# Altium PCB PCB1.PcbDoc (part 3 of 3)
Units mil, origin at the board's own origin, x right, y up, seen from the top; angles counter-clockwise.
Board outline 2406.58 x 2514.76 mil, 4 copper layers (Top Layer, GND1, GND2, Bottom Layer), stack 22.334 mil thick; 96 components, 76 nets, 372 pads, 263 vias.
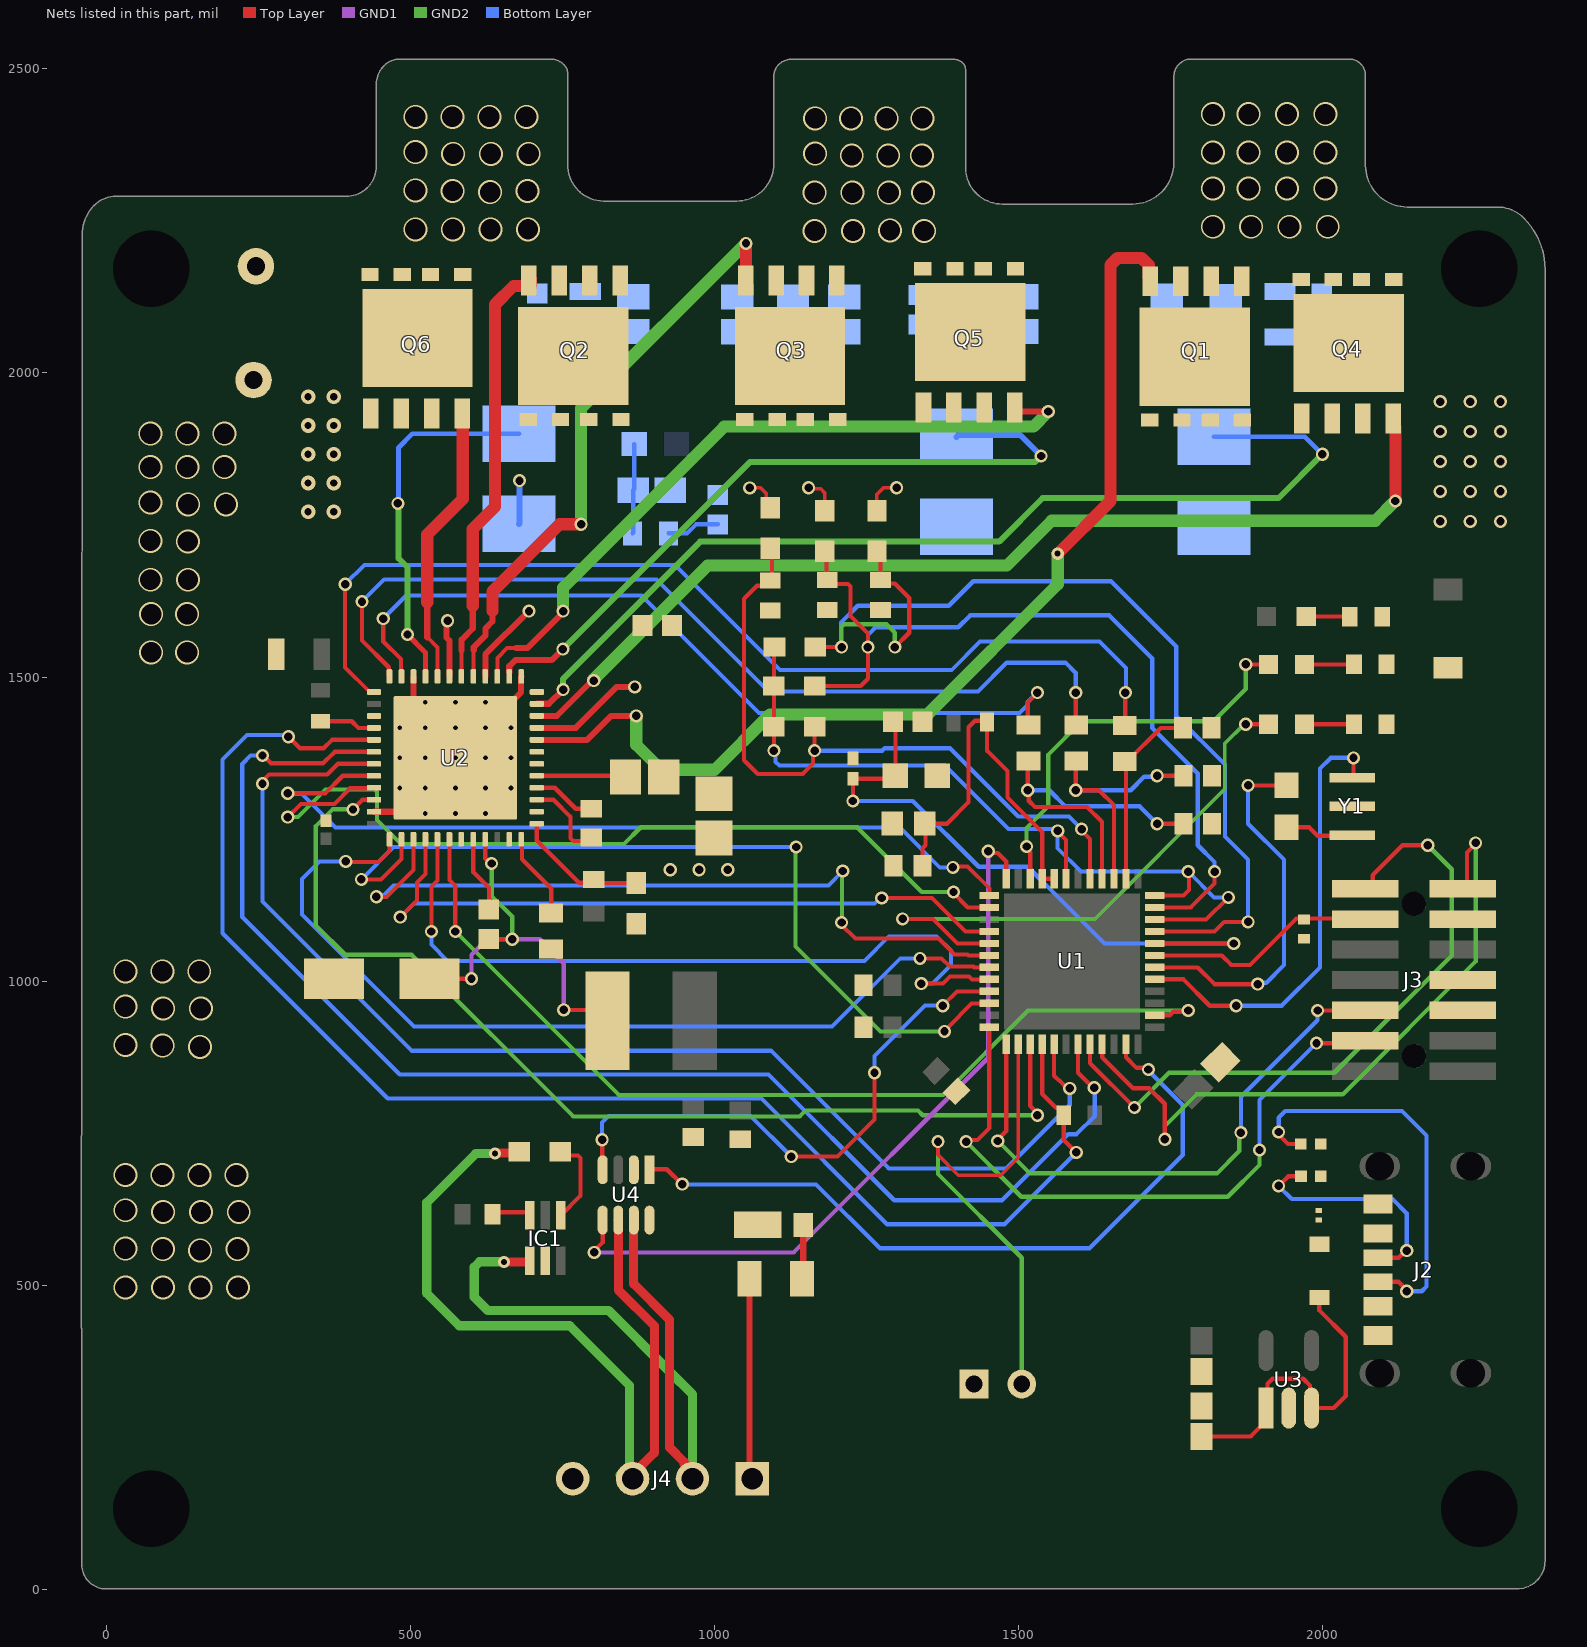
[diagram p4: the nets of this part, all layers, seen from the top]

## Via types
v1: diameter 21.65, hole 13.78, Top Layer to Bottom Layer, 139 vias
v2: diameter 39.37, hole 33.46, Top Layer to Bottom Layer, 90 vias
v3: diameter 19.68, hole 7.87, Top Layer to Bottom Layer, 21 vias
v4: diameter 24, hole 12, Top Layer to Bottom Layer, 10 vias
v5: diameter 20, hole 10, Top Layer to Bottom Layer, 3 vias

## Nets (pads, with @x,y where several pads share a name; then routed paths per layer and width w, separated by ;. In a path a pad name is that pad's centre, name@x,y a point inside that pad or via, vN(x,y) a via of type N, cw(c..) or ccw(c..) an arc to the next point about the centre after c; other vN are vias at no path point) (continued)
+VBATT: C12.2 C13.1 C15.1 C19.1 C20.1 C23.1 C24.1 C29.1 C32.1 C33.1 C34.1 C35.1 C36.1 C37.1 C38.1 C39.1 pad.8 Q1.5 Q1.6 Q1.7 Q1.8 Q1.9 Q2.5 Q2.6 Q2.7 Q2.8 Q2.9 Q3.5 Q3.6 Q3.7 Q3.8 Q3.9 R10.2 R17.2 U2.6 U2.7 U2.47
  other v2: 154.12,892.09 92.67,894.06 31.23,895.04 93.33,955.08 155.43,955.08 31.23,958.03 31.23,1016.11 92.02,1016.11 152.81,1016.11 73.74,1540.43 132.8,1540.43 73.74,1603.43 132.8,1603.43 72.49,1659.89 134.21,1659.89 133.93,1722.88 72.49,1723.86 134.59,1783.9 196.69,1783.9 72.49,1786.85 72.49,1844.92 133.28,1844.92 194.07,1844.92 72.49,1900.04 133.28,1900.04 194.07,1900.04
"ADC1 IN2 / COMP1 INP": R22.1 R25.2 R30.2 U1.9 | length 1716.6
  Top Layer w7: R30.2@1165.35,1549.21 v1(1208.66,1549.21) ; R22.1@1269.68,1693.9 1272.64,1690.94 R25.2@1272.64,1659.62 ; R25.2@1272.64,1649.78 R25.2@1272.64,1659.62 ; v1(1296.26,1549.21) 1319.88,1572.83 1319.88,1629.87 1296.01,1653.74 1278.52,1653.74 R25.2@1272.64,1659.62 ; U1.9@1723.6,1081.69 1821.85,1081.69 1837.6,1097.44 v1(1876.97,1097.44)
  GND2 w7: v1(1208.66,1549.21) 1208.66,1582.51 1212.76,1586.61 1282.48,1586.61 1296.26,1572.83 v1(1296.26,1549.21)
  Bottom Layer w7: v1(1208.66,1549.21) 1207.68,1550.2 1207.68,1589.57 1235.24,1617.13 1384.84,1617.13 1425.07,1657.36 1651.7,1657.36 1758.86,1550.2 1758.86,1436.02 1838.85,1356.03 1838.85,1237.92 1876.97,1199.8 v1(1876.97,1097.44)
"ADC1 IN3/COMP2 INM": R28.1 R29.1 R30.1 U1.10 U1.12 U1.19 | length 1336.2
  Top Layer w6.5: v1(1097.44,1378.94) R28.1@1097.44,1418.31 ; 1097.44,1436.02 R29.1@1097.44,1485.24 R30.1@1097.44,1549.21 ; v1(1563.98,1247.05) 1563.98,1245.51 1577.76,1231.73 U1.19@1577.76,1168.48 ; U1.10@1723.6,1101.38 1808.07,1101.38 v1(1844.49,1137.8) ; U1.12@1723.6,1140.75 1770.67,1140.75 1779.58,1149.66 1779.58,1179.08 v1(1778.54,1180.12)
  Bottom Layer w6.5: v1(1097.44,1378.94) 1100.34,1376.04 1100.34,1360.29 1106.3,1354.33 1378.94,1354.33 1483.27,1250 1552.59,1250 1552.65,1249.95 1561.08,1249.95 v1(1563.98,1247.05) 1563.98,1218.5 1602.36,1180.12 v1(1778.54,1180.12) 1820.87,1137.8 v1(1844.49,1137.8)
"ADC1 IN4 / COMP2 INP": R23.1 R26.2 R29.2 U1.11 | length 1415.5
  Top Layer w7: R29.2@1164.37,1485.24 1164.37,1497.48 1167.76,1494.09 1175.2,1494.09 1175.2,1488.57 1178.59,1485.18 1240.1,1485.18 1251.97,1497.05 v1(1251.97,1549.21) 1251.97,1571.76 1223.43,1600.31 1223.43,1648.63 1219.32,1652.73 R26.2@1187.99,1652.73 ; R23.1@1184.06,1693.9 1184.06,1650.76 R26.2@1185.04,1649.78 ; U1.11@1723.6,1121.06 1782.48,1121.06 1821.85,1160.43 v1(1821.85,1180.12)
  Bottom Layer w7: v1(1251.97,1549.21) 1251.97,1569.03 1260.2,1577.26 1260.2,1577.59 1264.3,1581.69 1400.59,1581.69 1420.28,1601.38 1648.62,1601.38 1719.49,1530.51 1719.49,1416.34 1794.29,1341.54 1794.29,1223.43 1821.64,1196.07 1821.64,1180.32 v1(1821.85,1180.12)
"ADC1 IN15 / COMP4 INP": R24.1 R27.2 R28.2 U1.17 | length 1146.9
  Top Layer w7: R27.2@1091.54,1648.97 1094.49,1651.92 1094.49,1658.81 R24.1@1094.49,1698.82 ; R27.2@1091.54,1658.81 1082.66,1649.94 1069.52,1649.94 1048.23,1628.64 1048.23,1363.19 1070.87,1340.55 1144.68,1340.55 1161.74,1357.61 1161.74,1376.31 v1(1164.37,1378.94) R28.2@1164.37,1418.31 ; v1(1603.35,1250) 1603.35,1247.03 1616.94,1233.43 1616.94,1168.67 U1.17@1617.13,1168.48
  Bottom Layer w7: v1(1164.37,1378.94) 1275.6,1378.94 1279.54,1382.87 1386.81,1382.87 1499.02,1270.67 1582.68,1270.67 v1(1603.35,1250)
ADC2_IN3: C8.1 R6.1 U1.14 | length 312.1
  Top Layer w7: R6.1@1674.21,1361.22 1676.18,1359.25 U1.14@1676.18,1168.48 ; R6.1@1678.15,1361.22 1733.27,1416.34 C8.1@1769.68,1416.34 C8.1@1766.73,1419.29
ADC2_IN4: C9.1 R7.1 U1.15 | length 429.7
  Top Layer w7: R7.1@1594.49,1362.2 1593.5,1361.22 v1(1593.5,1313.98) 1631.89,1313.98 1656.5,1289.37 U1.15@1656.5,1168.48 ; v1(1727.36,1337.6) C9.1@1770.67,1337.6
  Bottom Layer w7: v1(1593.5,1313.98) 1684.06,1313.98 1706.04,1335.96 1725.72,1335.96 v1(1727.36,1337.6)
ADC2_IN5: C10.2 R8.1 U1.16 | length 573.6
  Top Layer w7: R8.1@1515.75,1362.2 1514.76,1361.22 v1(1514.76,1313.98) 1516.41,1312.33 1516.41,1296.59 1526.57,1286.42 1612.2,1286.42 1636.63,1262 1636.63,1168.67 U1.16@1636.81,1168.48 ; v1(1727.36,1258.86) C10.2@1770.67,1258.86
  Bottom Layer w7: v1(1514.76,1313.98) 1550.2,1313.98 1576.77,1287.4 1698.82,1287.4 v1(1727.36,1258.86)
"CAN Mode": IC1.6 R4.2 | length 55.2
  Top Layer w7: R4.2@631.2,620.08 686.35,620.08
"CAN Term.": IC1.4 R31.2 | length 145.5
  Top Layer w7: R31.2@746.06,719.49 751.97,713.58 775.43,713.58 779.53,709.48 779.53,647.4 IC1.4@747.13,615
CAN_N: J4.3 R31.1 U4.6 | length 1354.1
  Top Layer w15: v5(638.78,716.54) 639.74,717.49 677.14,717.49 R31.1@679.13,719.49 ; U4.6@841.54,607.26 841.79,607.01 841.79,590.51 841.83,590.47 841.83,492.29 900.89,433.24 900.89,224.7 J4.3@864.31,188.12
  GND2 w15: v5(638.78,716.54) 607.28,716.54 526.71,635.96 526.71,487.07 580.17,433.61 761.73,433.61 860.21,335.14 860.21,187.99 J4.3@844.46,187.99
CAN_P: IC1.1 J4.2 U4.7 | length 1172.3
  Top Layer w15: v5(653.54,538.39) 695.57,538.39 695.94,538.76 IC1.1@695.94,540.2 ; U4.7@867.13,607.26 866.87,607.01 866.87,590.51 866.83,590.47 866.83,502.65 925.89,443.59 925.89,233.56 950.08,209.37 950.08,206.45 967.58,188.94 J4.2@970.51,188.94
  GND2 w15: v5@653.46,538.47 653.16,538.77 613.63,538.77 604.84,529.98 604.84,480.79 627.02,458.61 825.69,458.61 925.89,358.41 963.58,320.72 J4.2@963.58,182.09
CAN_RX: U1.33 U4.4 | length 920.6
  Top Layer w6.5: v1(1125.98,711.61) 1201.77,711.61 1262.8,772.64 v1(1262.8,849.41) ; v1(1375,959.65) 1398.19,982.83 1451.16,982.83 U1.33@1451.6,983.27
  Top Layer w7: v1(814.96,739.17) 815.45,738.68 815.45,690.47 U4.4@815.94,689.98
  Bottom Layer w6.5: v1(1262.8,849.41) 1262.8,876.97 1345.47,959.65 v1(1375,959.65)
  Bottom Layer w7: v1(814.96,739.17) 814.96,767.72 825.79,778.54 1059.06,778.54 v1(1125.98,711.61)
CAN_TX: U1.47 U4.1 | length 1224.8
  Top Layer w7: U4.1@892.72,689.98 893.68,690.94 921.26,690.94 945.87,666.34 v1(946.85,666.34) ; U1.47@1676.18,896.48 1676.37,896.3 1676.37,874.89 1693.74,857.52 1710.18,857.52 v1(1712.98,854.71)
  Bottom Layer w7: v1(946.85,666.34) 947.26,665.93 1166.75,665.93 1271.65,561.02 1616.14,561.02 1769.41,714.29 1769.41,796.4 1712.98,852.83 v1(1712.98,854.71)
"ESC PWM/TIM2_CH1": P1.2 U1.38 | length 831.6
  Top Layer w6: v1(1367.13,736.22) 1367.13,714.57 1400.59,681.1 1470.47,681.1 1499.02,709.65 U1.38@1499.02,896.48
  GND2 w7: v1(1367.13,736.22) 1367.13,683.07 1504.92,545.28 P1.2@1504.92,327.75
ESC_NRST: C1.1 J3.12 U1.7 | length 390.9
  Top Layer w7: U1.7@1723.6,1042.32 1833.66,1042.32 1849.41,1026.57 1879.92,1026.57 1956.3,1102.95 J3.12@2076.38,1102.95
FB: R12.1 R13.2 U2.1 | length 224.4
  Top Layer w7: U2.1@707.68,1258.86 707.68,1231.3 777.07,1161.91 795.77,1161.91 R12.1@801.18,1167.32 807.09,1161.42 R13.2@871.06,1161.42
GHA: Q1.4 U2.8 | length 1726
  Top Layer w10: U2.8@707.68,1396.65 790.35,1396.65 829.72,1436.02 v1(871.08,1436.02)
  Top Layer w20: v5(1563.98,1702.76) 1650.59,1789.37 1650.59,2177.26 1662.31,2188.98 1701.83,2188.98 1713.54,2177.26 1713.54,2155.74 Q1.4@1719.13,2150.15
  GND2 w20: v1(871.08,1436.02) 871.08,1388.76 912.4,1347.44 1000,1347.44 1091.04,1438.48 1349.9,1438.48 1563.98,1652.56 v5(1563.98,1702.76)
GHB: Q3.4 U2.17 | length 981.1
  Top Layer w6.5: U2.17@603.35,1500.98 603.35,1543.58 604.06,1544.29
  Top Layer w10: 604.06,1544.29 604.06,1548.99 623.05,1567.99 623.05,1579.65 634.84,1591.44 634.84,1608.27
  Top Layer w20: 634.84,1608.27 634.84,1640.75 745.08,1750.98 v1(780.51,1750.98) ; Q3.4@1051.57,2150.15 v1(1051.57,2212.76)
  GND2 w20: v1(780.51,1750.98) 780.51,1942.15 1051.13,2212.76 v1(1051.57,2212.76)
GHC: Q2.4 U2.18 | length 717.7
  Top Layer w6.5: 583.35,1543.31 583.66,1542.99 U2.18@583.66,1500.98
  Top Layer w10: 584.06,1544.02 584.06,1561.42 602.36,1579.72 602.36,1617.13
  Top Layer w20: 602.36,1617.13 602.36,1743.11 639.01,1779.76 639.01,2112.43 669.59,2143.01 697.87,2143.01 Q2.4@697.87,2155.59
GLA: Q4.4 U2.10 | length 1705.9
  Top Layer w10: U2.10@707.68,1436.02 740.9,1436.02 799.96,1495.08 v1@800.2,1495.08
  Top Layer w20: Q4.4@2115.2,1935.88 2115.2,1914.65 2119.09,1910.75 v1(2119.09,1789.37)
  GND2 w20: v1@800.2,1495.08 988.19,1683.07 1480.31,1683.07 1554.13,1756.89 2086.17,1756.89 2118.65,1789.37 v1(2119.09,1789.37)
  other v1: 801.18,1494.09
GLB: Q5.4 U2.15 | length 1181.2
  Top Layer w6.5: U2.15@642.72,1500.98 642.72,1531.5 659.02,1547.8 673.55,1547.8
  Top Layer w10: 673.55,1547.8 692.48,1547.8 750.98,1606.3 v1(750.98,1608.27) ; Q5.4@1496.52,1933.59 1499.44,1936.51 v1(1548.51,1936.51)
  GND2 w20: v1(750.98,1608.27) 750.98,1646.65 1015.87,1911.54 1523.98,1911.54 1548.51,1936.06 v1(1548.51,1936.51)
GLC: Q6.4 U2.20 | length 467.2
  Top Layer w6.5: 527.61,1565.43 544.29,1548.75 U2.20@544.29,1500.98
  Top Layer w10: 527.61,1565.43 527.61,1622.98
  Top Layer w20: 527.56,1623.03 527.56,1734.25 586.05,1792.74 Q6.4@586.05,1937.07
GND: C1.2 C2.2 C3.2 C4.2 C5.2 C6.1 C7.2 C8.2 C9.2 C10.1 C11.1 C12.1 C15.2 C18.2 C19.2 C20.2 C23.2 C24.2 C25.1 C26.1 C27.2 C28.2 C29.2 C30.1 C31.1 C32.2 C33.2 C34.2 C35.2 C36.2 C37.2 C38.2 C39.2 D1.2 D4.1 D5.2 IC1.2 J2.A12 J2.B12 J3.5 J3.7 J3.11 J4.4 P1.1 pad.9 R1.1 R2.1 R3.1 R13.1 R15.1 R18.1 R19.1 R20.1 R21.1 R25.1 R26.1 R27.1 R32.2 R33.2 U2.2 U2.12 U2.13 U2.22 U2.27 U2.35 U2.43 U2.49 U3.2 U4.2 U4.8 Y1.2 | length 302.7
  Top Layer w10: U2.35@439.96,1278.54 U2.49@521.26,1278.54 ; U2.22@504.92,1500.98 504.92,1463.5 509.76,1458.66 v3(524.21,1458.66) ; v3(623.43,1458.66) 665.35,1458.66 681.81,1475.12 681.81,1500.71 U2.13@682.09,1500.98
  Bottom Layer w10: R21.1@678.15,1751.77 679.13,1752.76 v1(679.13,1822.83)
  other v1: 927.17,1183.07 974.41,1183.07 1021.65,1183.07 2192.91,1755.91 2242.13,1755.91 2291.9,1755.9 2192.91,1805.12 2242.13,1805.12 2291.9,1805.11 2192.91,1854.33 2242.13,1854.33 2291.9,1854.32 2192.91,1903.54 2242.13,1903.54 2291.9,1903.54 2192.91,1952.76 2242.13,1952.76 2291.9,1952.75
  other v2: 31.38,496.42 93.11,496.42 154.84,496.42 216.56,496.42 154.28,557.44 92.83,559.41 215.72,559.41 31.38,560.4 93.49,620.44 155.59,620.44 217.69,620.44 31.38,623.39 31.38,681.46 92.17,681.46 152.96,681.46 213.75,681.46
  other v3: 524.21,1275.59 573.82,1275.59 623.43,1275.59 482.28,1317.52 524.21,1317.52 573.82,1317.52 623.43,1317.52 665.35,1317.52 482.28,1367.13 524.21,1367.13 573.82,1367.13 623.43,1367.13 665.35,1367.13 482.28,1416.73 524.21,1416.73 573.82,1416.73 623.43,1416.73 665.35,1416.73 573.82,1458.66
  other v4: 331.69,1771.65 374.02,1771.65 331.69,1818.9 374.02,1818.9 331.69,1866.14 374.02,1866.14 331.69,1913.39 374.02,1913.39 331.69,1960.63 374.02,1960.63
"GPIO PA6": R11.1 U2.28 | length 92.1
  Top Layer w7: R11.1@352.36,1427.17 403.54,1427.17 414.37,1416.34 U2.28@439.96,1416.34
"GPIO PB11": U1.24 U4.5 | length 1243.4
  Top Layer w7: v1(802.17,554.13) 802.17,556.74 815.94,570.51 U4.5@815.94,607.26 ; v1(1449.8,1213.58) 1452.61,1210.78 1465.4,1210.78 1479.33,1196.85 U1.24@1479.33,1168.48
  GND1 w7: v1(802.17,554.13) 1129.92,554.13 1449.8,874.02 v1(1449.8,1213.58)
"GPIO PB12": U1.25 U2.32 | length 1385.1
  Top Layer w6.5: v1(1391.73,1187.01) 1393.5,1188.77 1415.56,1188.77 1451.6,1152.73 U1.25@1451.6,1140.75
  Top Layer w7: v1(298.23,1309.06) 360.24,1309.06 388.78,1337.6 U2.32@439.96,1337.6
  Bottom Layer w6.5: v1(298.23,1309.06) 299.88,1307.4 321.53,1307.4 376.44,1252.5 1304.59,1252.5 1370.08,1187.01 v1(1391.73,1187.01)
"GPIO PB13": U1.26 U2.33 | length 1465.1
  Top Layer w7: v1(298.23,1269.68) 319.88,1291.34 375,1291.34 400.78,1317.12 439.17,1317.12 U2.33@439.96,1317.91 ; v1(1392.72,1146.65) 1392.72,1144.68 1416.15,1121.25 1451.41,1121.25 U1.26@1451.6,1121.06
  GND2 w7: v1(298.23,1269.68) 314.96,1269.68 360.24,1314.96 440.78,1314.96 444.88,1310.86 444.88,1264.76 484.25,1225.39 850.89,1225.39 878.44,1252.95 1234.25,1252.95 1340.55,1146.65 v1(1392.72,1146.65)
"GPIO PC10": U1.39 U2.34 | length 1722.5
  Top Layer w7: v1(405.52,1282.17) 405.52,1282.49 421.26,1298.23 U2.34@439.96,1298.23 ; U1.39@1518.7,896.48 1518.7,795.3 1530.51,783.49 v1(1530.51,779.53)
  GND2 w7: v1(405.52,1282.17) 405.21,1282.48 372.05,1282.48 344.49,1254.92 344.49,1091.54 392.72,1043.31 501.97,1043.31 767.72,777.56 1139.75,777.56 1149.59,787.4 1334.13,787.4 1342.01,779.53 v1(1530.51,779.53)
NetC6_2: C6.2 C7.1 FB1.1 U1.20 U1.21 | length 631.6
  Top Layer w7: C7.1@1341.54,1189.96 1341.54,1218.5 1346.46,1223.43 1346.46,1257.87 C6.2@1345.47,1258.86 1381.89,1258.86 1417.32,1294.29 1417.32,1417.32 1428.15,1428.15 1445.87,1428.15 FB1.1@1447.83,1426.18 1447.83,1378.94 1481.3,1345.47 1481.3,1302.17 1538.39,1245.08 U1.21@1538.39,1168.48 U1.20@1558.07,1168.48
NetC13_2: C13.2 U2.5 | length 146.5
  Top Layer w7: U2.5@707.68,1337.6 851.38,1337.6 C13.2@853.35,1335.63
NetC14_1: C14.1 U2.4 | length 103.8
  Top Layer w7: U2.4@707.68,1317.91 737.2,1317.91 771.65,1283.46 C14.1@797.24,1283.46
NetC14_2: C14.2 U2.3 | length 137.4
  Top Layer w7: U2.3@707.68,1298.23 735.13,1298.23 763.24,1270.13 763.24,1234.8 767.72,1230.31 C14.2@796.27,1230.31
NetC16_1: C16.1 U2.44 | length 126.2
  Top Layer w7: U2.44@603.35,1233.27 603.35,1179.13 628.94,1153.54 C16.1@628.94,1117.66
NetC16_2: C16.2 D1.1 L1.1 U2.45 | length 656.8
  Top Layer w7: D1.1@531.5,1003.94 v1(600.39,1003.94) ; U2.45@623.03,1233.27 623.03,1201.77 v1@628.94,1195.87 ; C16.2@628.94,1069.34 663.83,1069.34 v1@664.37,1069.88 ; v1(751.97,952.76) 806.1,952.76 L1.1@823.82,935.04
  GND1 w7: v1(600.39,1003.94) 600.39,1043.31 625.98,1068.9 v1(667.32,1068.9) 712.6,1068.9 751.97,1029.53 v1(751.97,952.76)
  GND2 w7: v1(633.42,1193.46) 633.42,1140.2 667.32,1106.3 v1(667.32,1068.9)
NetC30_2: C30.2 D3.1 U3.1 U3.3 | length 539.4
  Top Layer w7: C30.2@1800.2,251.36 1881.15,251.36 1906.5,276.7 U3.1@1906.5,298.19 1908.78,300.47 1908.78,338.19 1917.04,346.46 1967.52,346.46 1978.81,335.17 1978.81,300.68 U3.3@1981.3,298.19 2017.67,298.19 2037.4,317.91 2037.4,415.35 1994.09,458.66 D3.1@1994.09,479.72
NetD2_2: D2.2 F1.2 | length 89.4
  Top Layer w10: F1.2@1143.7,510.83 1145.67,512.8 D2.2@1145.67,599.41
NetF1_1: F1.1 J4.1 | length 329.4
  Top Layer w10: F1.1@1057.09,510.83 1057.09,187.01 J4.1@1061.02,183.07
NetJ2_A5: J2.A5 R32.1 | length 673.9
  Top Layer w7: v1(1927.17,751.97) 1927.17,748 1937.64,737.53 1937.64,737.23 1942.59,732.28 R32.1@1963.58,732.28 ; J2.A5@2090.35,505.91 2124.02,505.91 2137.8,492.13 v1(2137.8,490.16)
  Bottom Layer w7: v1(1927.17,751.97) 1927.17,775.59 1937.99,786.42 2129.92,786.42 2170.28,746.06 2170.28,498.03 2162.4,490.16 v1(2137.8,490.16)
NetJ2_B5: J2.B5 R33.1 | length 386.1
  Top Layer w7: v1(1927.17,663.39) 1942.91,679.13 R33.1@1964.01,679.13 ; J2.B5@2090.35,545.28 2124.48,545.28 2136.29,557.09 v1(2137.8,557.09)
  Bottom Layer w7: v1(1927.17,663.39) 1948.82,641.73 2114.17,641.73 2137.8,618.11 v1(2137.8,557.09)
NetLED1_1: LED1.1 R3.2 | length 81.6
  Top Layer w7: LED1.1@1969.49,1422.24 R3.2@2051.11,1422.24
NetLED2_1: LED2.1 R2.2 | length 81.6
  Top Layer w7: LED2.1@1969.49,1520.67 R2.2@2051.11,1520.67
NetLED3_1: LED3.1 R1.2 | length 71.7
  Top Layer w7: LED3.1@1972.44,1599.41 R1.2@2044.16,1599.41
NetR5_1: R5.1 U1.6 | length 619.6
  Top Layer w7: U1.6@1723.6,1022.64 1794.29,1022.64 1821.85,995.08 v1(1892.72,995.08) ; v1(1876.97,1321.85) R5.1@1939.96,1321.92 R5.1@1939.96,1321.92
  Bottom Layer w7: v1(1876.97,1321.85) 1876.97,1258.86 1936.02,1199.8 1936.02,1026.57 1906.7,997.25 1894.89,997.25 v1(1892.72,995.08)
NetR5_2: R5.2 Y1.1 | length 114.4
  Top Layer w7: R5.2@1939.96,1252.89 1977.43,1252.89 1991.14,1239.17 2047.24,1239.17 Y1.1@2048.23,1240.16
NetR10_1: R10.1 U2.48 | length 134.6
  Top Layer w7: U2.48@682.09,1233.27 683.31,1232.04 683.31,1200.55 731.3,1152.56 R10.1@731.3,1119.09
NetR14_1: R14.1 R15.2 R16.2 | length 147.8
  Bottom Layer w7: R16.2@865.16,1736.22 866.1,1737.16 R15.2@866.1,1807.09 868.04,1809.03 R14.1@868.04,1882.87
NetU1_5: U1.5 Y1.3 | length 738
  Top Layer w7: U1.5@1723.6,1002.95 1770.67,1002.95 1813.98,959.65 v1(1857.28,959.65) ; Y1.3@2048.23,1334.65 2050.2,1336.61 v1(2050.2,1367.13)
  Bottom Layer w7: v1(1857.28,959.65) 1932.09,959.65 1995.08,1022.64 1995.08,1349.41 2012.8,1367.13 v1(2050.2,1367.13)
"PHASE A": Q1.1 Q1.2 Q1.3 Q4.5 Q4.6 Q4.7 Q4.8 Q4.9 R22.2 U2.9 | length 282.2
  Top Layer w6: R22.2@1266.73,1773.62 1266.73,1800.34 1277.42,1811.02 v1(1299.21,1811.02) ; R22.2@1269.68,1760.83 1270.23,1761.37 1270.23,1784.03 1275.17,1784.03 R22.2@1274,1784.03
  Top Layer w10: U2.9@707.68,1416.34 771.65,1416.34 839.08,1483.76 v1(868.82,1483.76)
  other v2: 1818.9,2240.16 1881.89,2240.16 1944.88,2240.16 2007.87,2240.16 1818.9,2303.15 1877.95,2303.15 1940.94,2303.15 2003.94,2303.15 1818.9,2362.2 1877.95,2362.2 1940.94,2362.2 2003.94,2362.2 1818.9,2425.2 1877.95,2425.2 1940.94,2425.2 2003.94,2425.2
"PHASE B": Q3.1 Q3.2 Q3.3 Q5.5 Q5.6 Q5.7 Q5.8 Q5.9 R23.2 U2.16 | length 196.6
  Top Layer w6: v1(1154.51,1811.02) 1156.18,1809.35 1174.34,1809.35 1181.1,1802.59 R23.2@1181.1,1773.62
  Top Layer w10: U2.16@623.03,1500.98 623.03,1537.2 v1@694.09,1608.27
  Top Layer w20: v1@694.09,1608.27 v1(694.88,1608.27)
  other v2: 1164.37,2233.27 1227.36,2233.27 1344.49,2233.27 1288.39,2234.25 1164.37,2296.26 1226.38,2296.26 1286.42,2296.26 1342.52,2296.26 1225.39,2357.28 1285.43,2357.28 1340.55,2357.28 1165.35,2360.24 1165.35,2418.31 1224.08,2418.31 1282.81,2418.31 1341.54,2418.31
"PHASE C": Q2.1 Q2.2 Q2.3 Q6.5 Q6.6 Q6.7 Q6.8 Q6.9 R24.2 U2.19 | length 153.8
  Top Layer w6: v1(1057.62,1810.97) 1075.47,1810.97 1084.69,1801.75 1084.69,1775.54 R24.2@1086.88,1773.36
  Top Layer w10: v1@559.06,1592.52 559.06,1564.96 563.98,1560.04 U2.19@563.98,1500.98
  other v1: 561.02,1592.52
  other v2: 508,2235.91 569.73,2235.91 631.45,2235.91 693.18,2235.91 630.89,2296.94 569.45,2298.9 692.34,2298.9 508,2299.89 570.1,2359.93 632.2,2359.93 694.3,2359.93 508,2362.88 508,2420.95 568.79,2420.95 629.58,2420.95 690.37,2420.95
SCLK: U1.41 U2.31 | length 2052.8
  Top Layer w7: v1@257.87,1329.72 267.72,1339.57 363.19,1339.57 380.91,1357.28 U2.31@439.96,1357.28 ; U1.41@1558.07,896.48 1558.07,844.52 1566.07,836.52 1566.99,836.52 1579.7,823.82 v1(1583.66,823.82)
  Bottom Layer w7: v1(256.83,1324.67) 256.83,1130.97 501.97,885.83 1092.52,885.83 1286.42,691.93 1479.33,691.93 1583.66,796.26 v1(1583.66,823.82)
SDI: U1.43 U2.30 | length 2265.7
  Top Layer w7: v1@259.84,1369.09 270.67,1358.27 356.3,1358.27 363.91,1365.87 364.33,1365.87 375.42,1376.97 U2.30@439.96,1376.97 ; U1.43@1597.44,896.48 1597.44,849.41 1622.05,824.8 v1(1624.02,824.8)
  Bottom Layer w7: v1(256.83,1370.93) 237.23,1370.93 223.43,1357.12 223.43,1105.32 482.28,846.46 1088.58,846.46 1295.28,639.76 1472.46,639.76 1581.26,748.56 1595.02,748.56 1625,778.54 1625,823.82 v1(1624.02,824.8)
SDO: R9.1 U1.40 U2.29 | length 2420
  Top Layer w7: v1(299.38,1401.8) 318.3,1382.87 357.28,1382.87 371.06,1396.65 U2.29@439.96,1396.65 ; U1.40@1538.39,896.48 1538.39,814.96 1561.57,791.78 1565.51,791.78 1573.82,783.46 R9.1@1573.82,779.53 1573.82,739.17 v1(1594.49,718.5)
  Bottom Layer w7: v1(299.38,1401.8) 296.65,1404.53 231.3,1404.53 190.89,1364.12 190.89,1078.79 462.6,807.09 1076.77,807.09 1283.46,600.39 1476.38,600.39 v1(1594.49,718.5)
SOA: R6.2 U2.25 | length 1701.1
  Top Layer w6.5: v1(392.72,1652.56) 392.72,1515.55 431.4,1476.87 438.49,1476.87 U2.25@439.96,1475.39
  Top Layer w7: R6.2@1674.21,1420.28 1675.2,1421.26 v1(1675.2,1474.41)
  Bottom Layer w6.5: v1(392.72,1652.56) 424.21,1684.06 935.04,1684.06 1107.28,1511.81 1389.76,1511.81 1436.02,1558.07 1632.87,1558.07 1676.18,1514.76 1676.18,1475.39 v1(1675.2,1474.41)
SOB: R7.2 U2.24 | length 1518.9
  Top Layer w7: v1(420.28,1624.02) 420.28,1560.04 464.33,1515.99 464.33,1502.21 U2.24@465.55,1500.98 ; v1(1593.5,1474.41) 1593.5,1422.24 R7.2@1594.49,1421.26
  Bottom Layer w7: v1(420.28,1624.02) 456.69,1660.43 904.53,1660.43 1088.58,1476.38 1433.07,1476.38 1480.31,1523.62 1576.77,1523.62 1593.5,1506.89 v1(1593.5,1474.41)
SOC: R8.2 U2.23 | length 1354.6
  Top Layer w7: v1(455.21,1596) 455.21,1558.57 484.25,1529.53 484.25,1501.97 U2.23@485.24,1500.98 ; R8.2@1515.75,1421.26 1514.91,1422.1 1514.91,1458.81 v1(1530.51,1474.41)
  Bottom Layer w7: v1(455.21,1596) 493.06,1633.86 879.92,1633.86 1072.83,1440.94 1501.27,1440.94 1514.49,1454.16 1514.49,1458.39 v1(1530.51,1474.41)
SPA: Q4.1 Q4.2 Q4.3 R19.2 U2.11 | length 1661.8
  Top Layer w10: U2.11@707.68,1455.71 707.95,1455.98 727.64,1455.98 v1(750.98,1479.33)
  GND2 w10: v1(750.98,1479.33) 750.98,1497.05 976.38,1722.44 1467.52,1722.44 1539.37,1794.29 1927.17,1794.29 v1(1999.02,1866.14)
  Bottom Layer w8: R19.2@1820.87,1894.88 1970.28,1894.88 v1(1999.02,1866.14)
SPB: Q5.1 Q5.2 Q5.3 R20.2 U2.14 | length 1185.9
  Top Layer w10: U2.14@662.4,1507.8 662.4,1517.89 672.31,1527.8 732.12,1527.8 750.26,1545.93 v1(750.51,1545.93)
  GND2 w10: v1(750.51,1545.93) 1057.85,1853.27 1526.57,1853.27 v1(1536.61,1863.31) v1@1539.45,1866.14
  Bottom Layer w10: R20.2@1397.64,1894.88 1400.59,1897.83 1502.08,1897.83 v1(1536.61,1863.31)
SPC: Q6.1 Q6.2 Q6.3 R21.2 U2.21 | length 601.6
  Top Layer w8: v1(495.08,1569.88) 524.61,1540.35 U2.21@524.61,1500.98
  GND2 w10: v1@480.31,1783.46 480.31,1694.88 495.08,1680.12 v1(495.08,1569.88)
  Bottom Layer w8: v1@480.31,1783.46 480.31,1876.97 503.15,1899.8 R21.2@678.15,1899.8
  other v1: 479.33,1785.43
STATUS1: LED1.2 U1.29 | length 935
  Top Layer w6.5: v1(1309.06,1102.36) 1359.25,1102.36 1399.61,1062.01 U1.29@1451.6,1062.01
  Top Layer w7: v1@1875,1422.24 LED1.2@1910.43,1422.24
  GND2 w6.5: v1(1309.06,1102.36) 1625,1102.36 1838.58,1315.94 1838.58,1390.75 1870.08,1422.24 v1(1873.03,1422.24)
STATUS2: LED2.2 U1.22 | length 663.2
  Top Layer w7: v1(1512.8,1221.46) 1512.8,1217.49 1518.7,1211.59 U1.22@1518.7,1168.48 ; v1@1877.95,1520.67 LED2.2@1910.43,1520.67
  GND2 w7: v1(1512.8,1221.46) 1512.8,1251.97 1548.23,1287.4 1548.23,1372.05 1603.35,1427.17 1819.88,1427.17 1873.08,1480.37 1873.08,1497.11 1873.03,1497.16 v1(1873.03,1520.67)
SWCLK: J3.6 U1.37 | length 969.2
  Top Layer w7: v1(1465.55,737.2) 1465.55,739.81 1479.33,753.59 U1.37@1479.33,896.48 ; v1(1991.14,951.77) 2075.2,951.77 J3.6@2076.38,952.95
  GND2 w7: v1(1465.55,737.2) 1518.7,684.06 1825.79,684.06 1862.35,720.62 1862.35,748.18 v1(1865.16,750.98)
  Bottom Layer w7: v1(1865.16,750.98) 1865.16,810.04 1990.94,935.82 1990.94,951.57 v1(1991.14,951.77)
SWDIO: J3.4 U1.36 | length 1082.5
  Top Layer w7: v1(1413.39,736.22) 1416.19,739.02 1431.94,739.02 1451.6,758.68 U1.36@1451.6,924.21 ; v1(1989.43,898.15) 2071.57,898.15 J3.4@2076.38,902.95
  GND2 w7: v1(1413.39,736.22) 1503.94,645.67 1843.5,645.67 1895.67,697.83 v1(1895.67,722.44)
  Bottom Layer w7: v1(1895.67,722.44) 1895.67,804.39 v1(1989.43,898.15)
Therm: C25.2 R16.1 | length 86.8
  Bottom Layer w7: R16.1@924.21,1736.22 954.72,1736.22 969.49,1750.98 C25.2@1004.92,1750.98
"TIM1 CH1": U1.32 U2.41 | length 1273.1
  Top Layer w6.5: v1(534.45,1081.69) 534.45,1155.51 544.29,1165.35 U2.41@544.29,1233.27 ; v1(1339.57,996.06) 1375.41,996.06 1386.69,1007.34 1418.44,1007.34 1422.83,1002.95 U1.32@1451.6,1002.95
  Bottom Layer w6.5: v1(534.45,1081.69) 534.45,1060.04 561.02,1033.46 1246.06,1033.46 1286.42,1073.82 1365.16,1073.82 1388.78,1050.2 1388.78,1026.57 1358.27,996.06 v1(1339.57,996.06)
"TIM1 CH1N": U1.2 U2.42 | length 1587.4
  Top Layer w7: U2.42@563.98,1233.27 563.98,1166.34 573.82,1156.5 v1(573.82,1081.69) ; U1.2@1723.6,943.9 1748.03,943.9 1753.72,949.58 1776.35,949.58 v1(1778.54,951.77)
  GND2 w7: v1(573.82,1081.69) 842.52,812.99 1375.98,812.99 1514.76,951.77 v1(1778.54,951.77)
"TIM1 CH2": U1.31 U2.37 | length 1500.7
  Top Layer w6.5: v1(393.7,1196.85) 394.69,1195.87 447.83,1195.87 465.55,1213.58 U2.37@465.55,1233.27 ; v1(1337.6,1037.4) 1337.7,1037.3 1362.31,1037.3 1362.41,1037.4 1373.03,1037.4 1386.59,1023.84 1425.27,1023.84 1426.48,1022.64 U1.31@1451.6,1022.64
  Bottom Layer w6.5: v1(393.7,1196.85) 350.39,1196.85 321.85,1168.31 321.85,1109.25 505.91,925.2 1192.91,925.2 1305.12,1037.4 v1(1337.6,1037.4)
"TIM1 CH2N": U1.34 U2.38 | length 1409
  Top Layer w6.5: v1(419.29,1167.32) 451.77,1167.32 485.24,1200.79 U2.38@485.24,1233.27 ; v1(1377.95,917.49) 1383.34,922.88 1383.34,924.1 1422.39,963.15 1451.16,963.15 U1.34@1451.6,963.58
  GND2 w6.5: v1(1133.86,1220.47) 1132.87,1219.49 1132.87,1057.09 1272.47,917.49 v1(1377.95,917.49)
  Bottom Layer w6.5: v1(419.29,1167.32) 472.44,1220.47 v1(1133.86,1220.47)
"TIM1 CH3": U1.30 U2.39 | length 1268.3
  Top Layer w6.5: v1@442.91,1137.8 443.58,1138.46 460.31,1138.46 504.92,1183.07 U2.39@504.92,1233.27 ; v1(1208.66,1096.46) 1208.66,1092.52 1231.3,1069.88 1368.11,1069.88 1394.46,1043.53 1416.05,1043.53 1417.26,1042.32 U1.30@1451.6,1042.32
  GND2 w6.5: v1(1208.66,1096.46) 1209.65,1097.44 1209.65,1180.12 v1(1210.63,1181.1)
  Bottom Layer w6.5: v1(443.9,1138.78) 446.8,1141.68 456.64,1141.68 472.44,1157.48 1187.01,1157.48 v1(1210.63,1181.1)
"TIM1 CH3N": U1.28 U2.40 | length 1149.3
  Top Layer w6.5: v1(483.27,1105.31) 510.83,1132.87 510.83,1162.4 524.61,1176.18 U2.40@524.61,1233.27 ; v1(1274.61,1136.81) 1357.28,1136.81 1412.4,1081.69 U1.28@1451.6,1081.69
  Bottom Layer w6.5: v1(483.27,1105.31) 505.91,1127.95 1263.22,1127.95 1272.08,1136.81 v1(1274.61,1136.81)
"UART1 RX": J3.13 U1.45 | length 1133.8
  Top Layer w7: U1.45@1637,896.3 1637,874.89 1688.07,823.82 1714.57,823.82 1739.89,798.49 1739.89,740.42 v1(1740.16,740.16) ; J3.13@2236.61,1152.95 2236.61,1211.57 2250.98,1225.94 v1(2250.98,1227.36)
  GND2 w7: v1(1740.16,740.16) 1740.16,761.81 1792.32,813.98 2032.59,813.98 2250.98,1032.37 v1@2250.98,1226.9
"UART1 TX": J3.14 U1.44 | length 1091.3
  Top Layer w7: U1.44@1617.13,896.48 1617.13,865.16 v1(1689.96,792.32) ; J3.14@2076.38,1152.95 2081.69,1158.27 2081.69,1174.21 2130.91,1223.43 v1(2172.24,1223.43)
  GND2 w7: v1(1689.96,792.32) 1747.05,849.41 2018.7,849.41 2211.61,1042.32 2211.61,1184.06 v1(2172.24,1223.43)
VBUS: D2.1 D3.2 D4.2 J2.A9 J2.B9 | length 1.7
  Top Layer w10: D3.2@1993.11,568.5 D3.2@1994.09,567.52 ; J2.B9@2090.35,465.75 J2.B9@2090.55,465.55
"VBUS Sense": C26.2 R17.1 R18.2 U1.8 | length 1045.3
  Top Layer w7: v1@1227.36,1302.17 R17.1@1227.36,1332.63 1292.21,1332.63 R18.2@1297.18,1337.6 1297.18,1422.22 C26.2@1293.21,1426.18 ; U1.8@1723.6,1062.01 v1(1853.35,1062.01)
  Bottom Layer w7: v1(1227.36,1296.26) 1325.79,1296.26 1434.06,1187.99 1514.76,1187.99 1562.01,1140.75 1640.75,1062.01 v1(1853.35,1062.01)
pads on no net: IC1.3 J2.1 J2.2 J2.3 J2.4 J3. J3.1 J3.2 J3.8 J3.9 J3.10 R4.1 U1.3 U1.4 U1.13 U1.18 U1.27 U1.42 U1.46 U1.49 U2.46 U3.4

## Polygon pours and split planes (outlines as drawn)
GND on Top Layer "DGND" (solid, remove dead copper, pour order 30): -24.61,727.36 -24.61,443.9 -20.67,439.96 -20.67,21.06 2365.16,21.06 2365.16,2322.86 -24.61,2343.64
SPB on Top Layer "SPB_L01_P001" (solid, pour order 1): 1468.5,1897.64 1485.24,1880.91 1564.96,1880.91 1564.96,1820.87 1478.35,1820.87 1430.5,1868.71 1430.5,1899.61 1358.27,1899.61 1328.74,1929.13 1328.74,1968.08 1468.5,1968.08
+VBATT on Top Layer "+VBATT" (solid, remove dead copper, pour order 4): 282.8,943.57 213.58,1012.8 213.58,1648.62 300.2,1735.24 300.2,2092.52 -35.43,2092.52 -35.43,828.74 -17.92,828.74 -15.95,830.71 1083.66,830.71 1156.5,903.54 1156.5,1085.63 1184.06,1113.19 1184.06,1258.86 1184.05,1298.23 1214.12,1328.3 1214.12,1349.41 1240.6,1349.41 1240.6,1381.14 1217.76,1381.14 1186.02,1349.41 1054.13,1349.41 1026.57,1376.97 1026.57,1840.55 1324.73,1840.55 1329.11,1663.43 1458.43,1539.37 1745.08,1539.37 1901.57,1695.87 1901.57,2062.99 1665.35,2062.99 1318.9,2062.99 1318.9,2076.15 690.61,2076.15 687.99,2078.76 687.99,1865.16 906.82,1865.16 908.46,1866.8 908.46,1384.24 693.32,1384.24 693.32,1350.01 829.72,1350.01 829.72,1258.86 898.62,1258.86 898.62,1279.53 1040.35,1279.53 1044.29,1275.59 1044.29,1128.94 951.77,1128.94 892.72,1069.88 768.78,1069.88 690.89,1150.75 690.89,1244.19 633.88,1244.19 633.88,1155.49 652.56,1136.81 652.56,943.57
SPA on Top Layer "SPA_L01_P011" (solid, pour order 11): 1946.89,1933.59 2085.63,1933.59 2085.63,1803.15 2055.12,1772.64 1982.38,1772.64 1949.09,1805.92
"PHASE A" on Top Layer "PHASE_A_L01_P010" (solid, pour order 10): 1754.92,2290.35 1754.92,2503.94 2077.76,2503.94 2077.76,2277.56 2157.48,2277.56 2157.48,2062.52 1585.28,2062.52 1584.04,2290.35
"PHASE B" on Top Layer "PHASE_B_L01_P009" (solid, pour order 9): 1097.44,2282.48 1097.44,2503.94 1412.4,2503.94 1412.4,2290.35 1584.65,2290.35 1584.65,2067.91 957.32,2067.91 956.15,2282.48
"PHASE C" on Top Layer "PHASE_C_L01_P007" (solid, pour order 7): 613.19,2078.11 955.71,2078.11 955.71,2313.98 770.67,2313.98 770.67,2499.35 443.9,2499.35 443.9,2313.98 386,2313.98 387.28,2078.11
SPC on Top Layer "SPC_L01_P006" (solid, pour order 6): 453.74,1823.82 453.74,1782.48 468.5,1767.72 502.95,1767.72 511.81,1779.53 511.81,1784.45 511.81,1823.82 549.21,1861.22 549.21,1922.24 411.42,1922.24 412.4,1865.16
VBUS on Top Layer "VBUS_L01_P002" (solid, pour order 2): 1965.55,610.24 1212.6,610.24 1154.53,668.31 1026.57,668.31 1026.57,574.8 1027.56,573.82 1180.12,573.82 1213.58,540.35 1965.55,540.35 2019.68,540.35 2044.29,564.96 2158.46,564.96 2158.46,493.13 2146.62,481.29 2062.89,481.29 2062.8,481.19 2062.8,446.85 2202.76,446.85 2207.68,451.77 2207.68,610.24 2130.91,610.24
+3V3 on Top Layer "+3V3_L01_P028" (solid, pour order 28): 1688.98,907.17 1688.98,878.94 1718.5,878.94 1783.46,813.98 1790.35,813.98 1812.01,835.63 1745.08,902.56 1745.08,930.12 1744.09,931.1 1714.24,931.1
GND on GND1 "DGND" (solid, remove dead copper, pour order 24): -40.35,2337.6 2358.27,2337.6 2358.27,21.06 -40.35,21.06
"PHASE C" on GND1 "PHASE_C_L02_P012" (solid, pour order 12): 755.91,2267.72 755.91,2099.41 924.21,2099.41 1082.68,2099.41 1082.68,1771.65 597.4,1771.65 597.4,1558.07 529.53,1558.07 529.53,2027.56 460.63,2096.46 464.08,2515.75 754.92,2515.75 754.92,2268.7
"PHASE A" on GND1 "PHASE_A_L02_P016" (solid, pour order 16): 1472.44,1521.65 1272.64,1321.85 771.65,1321.85 771.65,1440.94 897.64,1566.93 1192.91,1566.93 1248.43,1622.44 1252.36,1921.65 1608.36,2277.65 1739.07,2277.65 1760.83,2299.41 1760.83,2515.75 2058.07,2515.75 2058.07,2125.98 1622.05,2125.98 1472.44,1976.38
"PHASE B" on GND1 "PHASE_B_L02_P015" (solid, pour order 15): 1104.33,1739.17 1104.33,2311.02 1104.33,2508.86 1398.62,2508.86 1398.62,2174.21 1210.63,1986.22 1210.63,1735.19 1121.06,1644.68 747.05,1644.68 718.5,1616.14 718.5,1588.58 716.54,1586.61 673.23,1586.61 669.78,1742.62 771.65,1739.17
+3V3 on Bottom Layer "VCC" (solid, remove dead copper, pour order 33): -3.55,2164.94 -3.55,21.06 2365.16,21.06 2365.16,2144.34
GND on Bottom Layer "DGND" (solid, remove dead copper, pour order 31): 1301.18,1841.54 1336.61,1806.1 1905.51,1806.1 1905.51,1681.1 1893.7,1669.29 1171.26,1669.29 1061.57,1778.98 896.65,1778.98 896.65,1840.55 973.43,1840.55 973.43,1992.13 584.65,1992.13 584.6,1992.17 584.6,2099.41 2338.58,2099.41 2338.58,1992.13 2338.58,1725.39 2163.39,1725.39 2162.4,1726.38 2162.4,1992.13 1301.18,1992.13
"PHASE A" on Bottom Layer "Phase A" (solid, remove dead copper, pour order 17): 1754.9,2511.43 1754.9,2200.41 2069.86,2200.41 2069.86,2511.43
"PHASE B" on Bottom Layer "Phase B" (solid, remove dead copper, pour order 26): 1098.11,2518.53 1098.11,2194.88 1413.07,2194.88 1413.07,2518.53
"PHASE C" on Bottom Layer "Phase C" (solid, remove dead copper, pour order 29): 442.91,2515.75 442.91,2194.88 757.87,2194.88 757.87,2515.75
+VBATT on Bottom Layer "+VBATT_L04_P032" (solid, pour order 32): -3.55,1486.22 -3.94,1485.83 -3.94,830.71 197.83,830.71 196.85,831.69 196.85,1035.43 155.51,1076.77 155.51,1406.5 235.24,1486.22 278.54,1486.22 278.54,2020.67 361.22,2103.35 2345.47,2103.35 2345.47,2277.56 -3.55,2277.56
GND on GND2 "DGND" (solid, remove dead copper, pour order 25): -40.35,2515.75 2361.02,2515.75 2361.02,35.82 -40.35,35.82

## Keep-outs
Keep-Out Layer:
  lines w40: 443.9,2343.5 cw(c385.33,2348.92) 379.92,2290.35 18.7,2290.35 ccw(c22.15,2227.85) -40.35,2224.41 -40.35,1239.17 -40.35,924.21 -40.35,747.05 -40.35,428.15 -40.35,43.31 ccw(c2.95,48.23) 7.87,4.92 2314.96,4.92 ccw(c2314.96,55.12) 2365.16,55.12 2365.16,2188.98 ccw(c2285.93,2194.39) 2291.34,2273.62 2139.76,2273.62 cw(c2139.76,2344.49) 2068.9,2344.49 2068.9,2509.84 1751.97,2509.84 1751.97,2342.52 cw(c1688.98,2342.52) 1688.98,2279.53 1468.5,2279.53 cw(c1468.5,2335.63) 1412.4,2335.63 1412.4,2514.76 1097.44,2514.76 1097.44,2347.44 cw(c1031.99,2347.93) 1031.5,2282.48 829.72,2282.48 ; 443.9,2356.3 443.9,2493.11 cw(c461.61,2493.11) 461.61,2510.83 755.91,2510.83 755.91,2361.22 ; 755.91,2353.35 ccw(c824.8,2351.38) 822.83,2282.48

## Silkscreen, mask and mechanical layers (free items; w line width, h text height)
Top Overlay:
  text "PhaseB" at 875.02,2209.13 h45
  text "PhaseC" at 295.29,2207.18 h45
  text "PhaseA" at 1590.57,2207.16 h45
  text "BEMF" at 1343.5,1725.39 h45 r270
  text "Stat.LED" at 1918.31,1675.68 h45
  text "+3V3" at 1028.56,992.63 h45
  text "+VBATT" at 40.37,789.37 h45
  text "+3V3" at 1696.87,478.85 h45
  text "ESC PWM" at 1368.11,433.57 h45
  text "GND" at 78.74,404.03 h45
  text "CAN" at 672.26,357.77 h45
  text "USBC" at 2194.9,262.3 h45
Bottom Overlay:
  text "Temp" at 1067.91,1678.24 h45
Top Solder:
  circle w30: c242.05,1988.19 r15
  circle w30: c2256.89,132.87 r15
  circle w30: c73.82,132.87 r15
  circle w30: c2256.89,2171.26 r15
  circle w30: c73.82,2171.26 r15
  region: -4.92,1066.93 192.91,1066.93 192.91,845.47 -4.92,845.47
  region: -0.37,710.63 246.06,710.63 246.06,450.79 -0.37,450.79
  region: 718.5,2455.71 481.72,2455.71 483.54,2195.87 718.5,2195.87
  region: 2031.5,2462.22 1790.43,2462.22 1792.28,2197.83 2031.5,2197.83
  region: 1368.11,2462.22 1140.83,2462.22 1142.69,2195.87 1368.11,2195.87
Bottom Solder:
  circle w30: c242.05,1988.19 r15
  circle w30: c2256.89,132.87 r15
  circle w30: c73.82,132.87 r15
  circle w30: c2256.89,2171.26 r15
  circle w30: c73.82,2171.26 r15
Mechanical 1:
  lines w10: -41.43,429.48 -40.35,429.48 -40.35,176.18 -40.35,77.02 -40.35,40.97 ccw(c-0.37,40.97) -0.37,0.98 2318.9,0.98 ccw(c2318.9,47.24) 2365.16,47.24 ; -41.13,430.75 -41.13,745.71 ; -40.35,747.05 -40.35,924.21 -40.35,1239.17 -39.81,2173.04 -39.81,2227 cw(c28.91,2227) -19.68,2275.59 cw(c15.96,2239.95) 15.96,2290.35 97.44,2290.35 394.68,2290.35 ccw(c394.68,2339.57) 443.9,2339.57 443.9,2432.09 443.9,2465.55 443.9,2475.42 cw(c484.22,2475.42) 455.71,2503.94 457.78,2506 cw(c481.3,2482.48) 481.3,2515.75 721.46,2515.75 730.58,2515.75 cw(c730.58,2485.5) 751.97,2506.89 cw(c735.34,2490.26) 758.86,2490.26 758.86,2465.55 758.86,2432.09 758.86,2337.6 ccw(c817.91,2341.54) 821.85,2282.48 1036.42,2282.48 ccw(c1036.42,2343.5) 1097.44,2343.5 1097.44,2439.96 1097.44,2481.3 1097.44,2488.15 cw(c1123.68,2488.15) 1105.13,2506.7 cw(c1126.97,2484.86) 1126.97,2515.75 1381.5,2515.65 1392.07,2515.65 cw(c1392.07,2492.47) 1408.46,2508.86 cw(c1398.96,2499.35) 1412.4,2499.35 1412.4,2477.36 1412.4,2436.02 1412.4,2337.6 ccw(c1472.44,2337.6) 1472.44,2277.56 1687.01,2277.56 ccw(c1687.01,2345.47) 1754.92,2345.47 1754.92,2439.96 ; 1754.92,2439.96 ccw(c1754.92,2439.96) 1754.92,2439.96 ; 1754.92,2439.96 1754.92,2486.22 cw(c1783.46,2487.2) 1782.48,2515.75 2042.32,2515.75 cw(c2043.31,2489.17) 2069.88,2490.16 2069.88,2443.9 2069.88,2341.54 ccw(c2138.78,2341.54) 2138.78,2272.64 2286.84,2272.64 cw(c2286.84,2211.88) 2329.8,2254.84 cw(c2244.45,2169.49) 2365.16,2169.49 2365.16,2046.26 2365.16,176.18 2365.16,47.24 ; 2365.16,47.24 ccw(c2365.16,47.24) 2365.16,47.24

## Text inside footprints (layer, text, board x,y; h text height)
U1: Top 3D Body "*" at 1720.1,939.37 h50 r180